# Allegro board BSTPLC.brd

Outline 406.4 x 406.4 mm; copper layers: TOP, GND_TOP, VTT, VEE, VCC, GND_BOT, BOTTOM. Coordinates in mm from the lower left corner of the outline.
Outline path: rectangle 0,0 406.4,406.4

## Design rules (mm)
net group DP_BCKP_CLK_BUFD: nets BCKP_CLK_BUFD_N BCKP_CLK_BUFD_P
net group DP_CHANGE_CLK2: nets CHANGE_CLK2_N CHANGE_CLK2_P
net group DP_CHOSEN_CLK: nets CHOSEN_CLK_N CHOSEN_CLK_P
net group DP_CHOSEN_CLK2: nets CHOSEN_CLK2_N CHOSEN_CLK2_P
net group DP_CLK_BAD: nets CLK_BAD_N CLK_BAD_P
net group DP_DEF_CLK_DIV2: nets DEF_CLK_DIV2_N DEF_CLK_DIV2_P
net group DP_DEF_CLK_DIV4: nets DEF_CLK_DIV4_N DEF_CLK_DIV4_P
net group DP_DEF_CLK_DIV8: nets DEF_CLK_DIV8_N DEF_CLK_DIV8_P
net group DP_DEF_CLK_DIVD: nets DEF_CLK_DIVD_N DEF_CLK_DIVD_P
net group DP_GT2_N: nets GT2_N UNNAMED_1_CAENCOMS_I8_GT2P
net group DP_RIB1: nets RIB1_N RIB1_P
net group DP_RIB2: nets RIB2_N RIB2_P
net group DP_RIB3: nets RIB3_N RIB3_P
net group DP_RIB4: nets RIB4_N RIB4_P
net group DP_RIB5: nets RIB5_N RIB5_P
net group DP_RIB6: nets RIB6_N RIB6_P
net group DP_RIB7: nets RIB7_N RIB7_P
net group DP_RIB8: nets RIB8_N RIB8_P
net group DP_RIB9: nets RIB9_N RIB9_P
net group DP_RIB10: nets RIB10_N RIB10_P
net group DP_SMELLIE_DELAY_BUF: nets SMELLIE_DELAY_BUF_N SMELLIE_DELAY_BUF_P
net group DP_SYNC24_2: nets SYNC24_2_N SYNC24_2_P
net group DP_SYNC_2: nets SYNC_2_N SYNC_2_P
net group DP_TELLIE_DELAY_BUF: nets TELLIE_DELAY_BUF_N TELLIE_DELAY_BUF_P
net group DP_TRIG_GATE1: nets TRIG_GATE1_N TRIG_GATE1_P
net group DP_TRIG_GATE2: nets TRIG_GATE2_N TRIG_GATE2_P
net group DP_TRIG_PULS1: nets TRIG_PULS1_N TRIG_PULS1_P
net group DP_TRIG_PULS2: nets TRIG_PULS2_N TRIG_PULS2_P
net group DP_UNNAMED_1_AD96687_I1_Q1: nets UNNAMED_1_AD96687_I1_Q1 UNNAMED_1_AD96687_I1_Q1_1
net group DP_UNNAMED_1_AD96687_I1_Q2: nets UNNAMED_1_AD96687_I1_Q2 UNNAMED_1_AD96687_I1_Q2_1
net group DP_UNNAMED_1_CHANGECLKS_I3_BCKPCLK2: nets UNNAMED_1_CHANGECLKS_I3_BCKPC_1 UNNAMED_1_CHANGECLKS_I3_BCKPCLK
net group DP_UNNAMED_1_CHANGECLKS_I3_BCKPCLK3: nets UNNAMED_1_CHANGECLKS_I3_BCKPC_2 UNNAMED_1_CHANGECLKS_I3_BCKPC_3
net group DP_UNNAMED_1_CHANGECLKS_I3_CHANGECLK: nets UNNAMED_1_CHANGECLKS_I3_CHANG_1 UNNAMED_1_CHANGECLKS_I3_CHANGEC
net group DP_UNNAMED_1_CHANGECLKS_I3_DEFAULTCLK2: nets UNNAMED_1_CHANGECLKS_I3_DEFAU_1 UNNAMED_1_CHANGECLKS_I3_DEFAULT
net group DP_UNNAMED_1_CSMD0603_I10_B: nets UNNAMED_1_CSMD0603_I10_B_1 UNNAMED_1_FRONTPORTS_I2_SMELLIE
net group DP_UNNAMED_1_CSMD0603_I54_B: nets UNNAMED_1_CSMD0603_I54_B UNNAMED_1_FRONTPORTS_I2_EXTT<0>
net group DP_UNNAMED_1_CSMD0603_I55_A: nets UNNAMED_1_CSMD0603_I55_A UNNAMED_1_FRONTPORTS_I2_EXTT<4>
net group DP_UNNAMED_1_CSMD0805_I64_B: nets UNNAMED_1_CSMD0805_I64_B UNNAMED_1_CSMD0805_I70_B
net group DP_UNNAMED_1_DEFAULTCLKSEL_I1_DEFAULTCLK: nets UNNAMED_1_DEFAULTCLKSEL_I1_BCKP UNNAMED_1_MC10E116_I1_D0
net group DP_UNNAMED_1_FRONTPORTS_I2_CLK100: nets UNNAMED_1_FRONTPORTS_I2_CLK100N UNNAMED_1_FRONTPORTS_I2_CLK100P
net group DP_UNNAMED_1_FRONTPORTS_I2_ECLTOLVDSIN: nets UNNAMED_1_FRONTPORTS_I2_ECLTOLV VBB_TRANS
net group DP_UNNAMED_1_FRONTPORTS_I2_GT: nets UNNAMED_1_FRONTPORTS_I2_GTN UNNAMED_1_FRONTPORTS_I2_GTP
net group DP_UNNAMED_1_FRONTPORTS_I2_LOSTAROUT: nets UNNAMED_1_FRONTPORTS_I2_LOSTA_1 UNNAMED_1_FRONTPORTS_I2_LOSTARO
net group DP_UNNAMED_1_FRONTPORTS_I2_MTCAMIMIC1OUT: nets UNNAMED_1_FRONTPORTS_I2_MTCAM_1 UNNAMED_1_FRONTPORTS_I2_MTCAMIM
net group DP_UNNAMED_1_FRONTPORTS_I2_MTCAMIMIC2OUT: nets UNNAMED_1_FRONTPORTS_I2_MTCAM_3 UNNAMED_1_FRONTPORTS_I2_MTCAM_4
net group DP_UNNAMED_1_FRONTPORTS_I2_MTCDLO: nets LO_STAR_RAW UNNAMED_1_MC10E116_I2_D0
net group DP_UNNAMED_1_FRONTPORTS_I2_RIBBONPULSEIN: nets UNNAMED_1_FRONTPORTS_I2_RIBBO_1 UNNAMED_1_FRONTPORTS_I2_RIBBONP
net group DP_UNNAMED_1_FRONTPORTS_I2_RIBBONPULSEOUT: nets UNNAMED_1_FRONTPORTS_I2_RIBBO_2 UNNAMED_1_FRONTPORTS_I2_RIBBO_3
net group DP_UNNAMED_1_FRONTPORTS_I2_SYNC: nets UNNAMED_1_FRONTPORTS_I2_SYNCN UNNAMED_1_FRONTPORTS_I2_SYNCP
net group DP_UNNAMED_1_FRONTPORTS_I2_SYNC24: nets UNNAMED_1_FRONTPORTS_I2_SYNC24N UNNAMED_1_FRONTPORTS_I2_SYNC24P
net group DP_UNNAMED_1_FRONTPORTS_I2_SYNC24LVDS: nets UNNAMED_1_FRONTPORTS_I2_SYNC2_1 UNNAMED_1_FRONTPORTS_I2_SYNC24L
net group DP_UNNAMED_1_FRONTPORTS_I2_SYNCLVDS: nets UNNAMED_1_FRONTPORTS_I2_SYNCL_1 UNNAMED_1_FRONTPORTS_I2_SYNCLVD
net group DP_UNNAMED_1_MC10E116_I1_Q0: nets UNNAMED_1_MC10E116_I1_Q0 UNNAMED_1_MC10E116_I1_Q0_1
net group DP_UNNAMED_1_MC10E116_I1_Q3: nets UNNAMED_1_MC10E116_I1_Q3 UNNAMED_1_MC10E116_I1_Q3_1
net group DP_UNNAMED_1_MC10E116_I3_Q0: nets UNNAMED_1_MC10E116_I3_Q0 UNNAMED_1_MC10E116_I3_Q0_1
net group DP_UNNAMED_1_MC10E116_I3_Q1: nets UNNAMED_1_MC10E116_I3_Q1 UNNAMED_1_MC10E116_I3_Q1_1
net group DP_UNNAMED_1_MC10E116_I3_Q2: nets UNNAMED_1_MC10E116_I3_Q2 UNNAMED_1_MC10E116_I3_Q2_1
net group DP_UNNAMED_1_MC10E116_I3_Q3: nets UNNAMED_1_MC10E116_I3_Q3 UNNAMED_1_MC10E116_I3_Q3_1
net group DP_UNNAMED_1_MC10E116_I4_Q0: nets UNNAMED_1_MC10E116_I4_Q0 UNNAMED_1_MC10E116_I4_Q0_1
net group DP_UNNAMED_1_MC10E116_I4_Q1: nets UNNAMED_1_MC10E116_I4_Q1 UNNAMED_1_MC10E116_I4_Q1_1
net group DP_UNNAMED_1_MC10E116_I4_Q2: nets UNNAMED_1_MC10E116_I4_Q2 UNNAMED_1_MC10E116_I4_Q2_1
net group DP_UNNAMED_1_MC10E116_I4_Q3: nets UNNAMED_1_MC10E116_I4_Q3 UNNAMED_1_MC10E116_I4_Q3_1
net group DP_UNNAMED_1_MC10E116_I22_Q0: nets UNNAMED_1_MC10E116_I22_Q0 UNNAMED_1_MC10E116_I22_Q0_1
net group DP_UNNAMED_1_MC10E116_I22_Q1: nets UNNAMED_1_MC10E116_I22_Q1 UNNAMED_1_MC10E116_I22_Q1_1
net group DP_USE_BCKP: nets USE_BCKP_N USE_BCKP_P
net group DP_USE_DEFAULT: nets USE_DEFAULT_N USE_DEFAULT_P
net group BACKPLANE_IN: nets BACKPLANE_IN<1> BACKPLANE_IN<2> BACKPLANE_IN<3> BACKPLANE_IN<4> BACKPLANE_IN<5> BACKPLANE_IN<6> BACKPLANE_IN<7> BACKPLANE_IN<8> BACKPLANE_IN<9> BACKPLANE_IN<10>
net group BACKPLANE_OUT: nets BACKPLANE_OUT<1> BACKPLANE_OUT<2> BACKPLANE_OUT<3> BACKPLANE_OUT<4> BACKPLANE_OUT<5> BACKPLANE_OUT<6> BACKPLANE_OUT<7> BACKPLANE_OUT<8> BACKPLANE_OUT<9> BACKPLANE_OUT<10>
net group CAEN_BUFF_CNTRL: nets CAEN_BUFF_CNTRL<0> CAEN_BUFF_CNTRL<1> CAEN_BUFF_CNTRL<2> CAEN_BUFF_CNTRL<3> CAEN_BUFF_CNTRL<4> CAEN_BUFF_CNTRL<5> CAEN_BUFF_CNTRL<6> CAEN_BUFF_CNTRL<7>
net group CNTRL_RAW: nets CNTRL_RAW<0> CNTRL_RAW<1> CNTRL_RAW<2> CNTRL_RAW<3> CNTRL_RAW<4> CNTRL_RAW<5> CNTRL_RAW<6> CNTRL_RAW<7>
net group COUNT_DATA_ECL: nets COUNT_DATA_ECL<1> COUNT_DATA_ECL<2> COUNT_DATA_ECL<3> COUNT_DATA_ECL<4> COUNT_DATA_ECL<5> COUNT_DATA_ECL<6> COUNT_DATA_ECL<7>
net group LE: nets UNNAMED_1_HCT238_I53_A0 UNNAMED_1_HCT238_I53_A1 UNNAMED_1_HCT238_I53_A2
net group UNNAMED_1_EXTTRIGS_I70_EXTTRIGO: nets UNNAMED_1_EXTTRIGS_I70_EXTT<10> UNNAMED_1_EXTTRIGS_I70_EXTT<11> UNNAMED_1_EXTTRIGS_I70_EXTT<12> UNNAMED_1_EXTTRIGS_I70_EXTT<13> UNNAMED_1_EXTTRIGS_I70_EXTT<14> UNNAMED_1_EXTTRIGS_I70_EXTT<15> UNNAMED_1_EXTTRIGS_I70_EXTTR<0> UNNAMED_1_EXTTRIGS_I70_EXTTR<1> UNNAMED_1_EXTTRIGS_I70_EXTTR<2> UNNAMED_1_EXTTRIGS_I70_EXTTR<3> UNNAMED_1_EXTTRIGS_I70_EXTTR<4> UNNAMED_1_EXTTRIGS_I70_EXTTR<5> UNNAMED_1_EXTTRIGS_I70_EXTTR<6> UNNAMED_1_EXTTRIGS_I70_EXTTR<7> UNNAMED_1_EXTTRIGS_I70_EXTTR<8> UNNAMED_1_EXTTRIGS_I70_EXTTR<9>
net group UNNAMED_1_FRONTPORTS_I2_CAENOUT: nets UNNAMED_1_FRONTPORTS_I2_CAEN<0> UNNAMED_1_FRONTPORTS_I2_CAEN<1> UNNAMED_1_FRONTPORTS_I2_CAEN<2> UNNAMED_1_FRONTPORTS_I2_CAEN<3> UNNAMED_1_FRONTPORTS_I2_CAEN<4> UNNAMED_1_FRONTPORTS_I2_CAEN<5> UNNAMED_1_FRONTPORTS_I2_CAEN<6> UNNAMED_1_FRONTPORTS_I2_CAEN<7>
net group UNNAMED_1_FRONTPORTS_I2_EXTTRIG: nets UNNAMED_1_FRONTPORTS_I2_EXT<10> UNNAMED_1_FRONTPORTS_I2_EXT<11> UNNAMED_1_FRONTPORTS_I2_EXT<12> UNNAMED_1_FRONTPORTS_I2_EXT<13> UNNAMED_1_FRONTPORTS_I2_EXT<14> UNNAMED_1_FRONTPORTS_I2_EXT<15> UNNAMED_1_FRONTPORTS_I2_EXTT<1> UNNAMED_1_FRONTPORTS_I2_EXTT<2> UNNAMED_1_FRONTPORTS_I2_EXTT<3> UNNAMED_1_FRONTPORTS_I2_EXTT<5> UNNAMED_1_FRONTPORTS_I2_EXTT<6> UNNAMED_1_FRONTPORTS_I2_EXTT<7> UNNAMED_1_FRONTPORTS_I2_EXTT<8> UNNAMED_1_FRONTPORTS_I2_EXTT<9>
net group UNNAMED_1_FRONTPORTS_I2_PULSE_2: nets UNNAMED_1_FRONTPORTS_I2_PUL<10> UNNAMED_1_FRONTPORTS_I2_PUL<11> UNNAMED_1_FRONTPORTS_I2_PULS<0> UNNAMED_1_FRONTPORTS_I2_PULS<1> UNNAMED_1_FRONTPORTS_I2_PULS<2> UNNAMED_1_FRONTPORTS_I2_PULS<3> UNNAMED_1_FRONTPORTS_I2_PULS<4> UNNAMED_1_FRONTPORTS_I2_PULS<5> UNNAMED_1_FRONTPORTS_I2_PULS<6> UNNAMED_1_FRONTPORTS_I2_PULS<7> UNNAMED_1_FRONTPORTS_I2_PULS<8> UNNAMED_1_FRONTPORTS_I2_PULS<9>
net group UNNAMED_1_FRONTPORTS_I2_SCALER: nets UNNAMED_1_FRONTPORTS_I2_SCAL<1> UNNAMED_1_FRONTPORTS_I2_SCAL<2> UNNAMED_1_FRONTPORTS_I2_SCAL<3> UNNAMED_1_FRONTPORTS_I2_SCAL<4> UNNAMED_1_FRONTPORTS_I2_SCAL<5> UNNAMED_1_FRONTPORTS_I2_SCAL<6>
net group UNNAMED_1_FRONTPORTS_I2_SCOPEOU: nets UNNAMED_1_FRONTPORTS_I2_SCOP<0> UNNAMED_1_FRONTPORTS_I2_SCOP<1> UNNAMED_1_FRONTPORTS_I2_SCOP<2> UNNAMED_1_FRONTPORTS_I2_SCOP<3> UNNAMED_1_FRONTPORTS_I2_SCOP<4> UNNAMED_1_FRONTPORTS_I2_SCOP<5> UNNAMED_1_FRONTPORTS_I2_SCOP<6> UNNAMED_1_FRONTPORTS_I2_SCOP<7>

## Placement (name value [footprint] x y rotation side)
C1  0.1UF  [CAP0603]  336.55 53.34 90 top
C2  0.1UF  [CAP0603]  342.9 34.29 0 top
C3  0.1UF  [CAP0603]  336.55 34.29 90 top
C4  1.0UF  [CAP0603]  73.03 129.51 90 top
C5  1.0UF  [CAP0603]  78.11 145.44 270 top
C6  1.0UF  [CAP0603]  104.8 125.1 180 bottom
C7  1.0UF  [CAP0603]  103.48 123.83 0 bottom
C8  0.1UF  [CAP805]  101.6 134.62 0 top
C9  1.0UF  [CAP0603]  92.08 143.48 90 top
C10  0.1UF  [CAP805]  99.06 154.94 180 top
C11  0.1UF  [CAP0603]  216.56 264.8 180 bottom
C12  0.1UF  [CAP0603]  194.92 239.39 0 bottom
C13  0.1UF  [CAP0603]  203.84 264.13 90 top
C14  0.1UF  [CAP0603]  196.24 248.92 180 bottom
C15  0.1UF  [CAP0603]  218.44 243.84 90 bottom
C16  1.0UF  [CAP805]  38.1 165.1 90 top
C17  1.0UF  [CAP805]  50.8 180.34 90 top
C18  1.0UF  [CAP805]  50.8 165.1 270 top
C19  1.0UF  [CAP805]  38.1 180.34 90 top
C20  1.0UF  [CAP805]  63.5 165.1 90 top
C21  1.0UF  [CAP805]  63.5 180.34 270 top
C22  0.1UF  [CAP0603]  112.4 210.79 90 top
C23  0.1UF  [CAP0603]  144.17 207.01 180 bottom
C24  0.1UF  [CAP0603]  142.85 204.47 0 bottom
C25  0.1UF  [CAP0603]  140.34 188.62 270 top
C26  0.1UF  [CAP0603]  172.72 37.44 90 bottom
C27  0.1UF  [CAP0603]  183.49 17.78 0 bottom
C28  0.1UF  [CAP0603]  199.42 48.26 180 top
C29  0.1UF  [CAP0603]  196.85 28.55 90 top
C30  0.1UF  [CAP0603]  184.81 20.95 180 bottom
C31  10NF  [CAP0603]  142.24 124.43 90 top
C32  0.1UF  [CAP0603]  169.52 121.92 0 top
C33  0.1UF  [CAP0603]  169.52 120.65 0 bottom
C34  0.1UF  [CAP0603]  185.42 139.04 90 top
C35  0.1UF  [CAP0603]  168.88 104.14 0 bottom
C36  0.1UF  [CAP0603]  170.21 111.76 180 bottom
C37  0.1UF  [CAP0603]  186.03 102.23 0 top
C38  0.1UF  [CAP0603]  147.32 263.55 270 bottom
C39  0.1UF  [CAP0603]  154.94 262.23 90 bottom
C40  0.1UF  [CAP0603]  139.7 243.81 90 top
C41  0.1UF  [CAP0603]  273.66 32.39 0 top
C42  0.1UF  [CAP0603]  264.16 15.24 90 top
C43  0.1UF  [CAP0603]  276.22 41.3 270 bottom
C44  0.1UF  [CAP0603]  264.16 59.69 180 top
C45  0.1UF  [CAP0603]  296.54 40.61 90 bottom
C46  0.1UF  [CAP0603]  294 41.94 270 bottom
C47  0.1UF  [CAP0603]  281.3 209.52 90 top
C48  0.1UF  [CAP0603]  273.05 198.15 270 top
C49  0.1UF  [CAP805]  293.37 213.36 180 top
C50  1.0UF  [CAP0603]  303.53 203.86 270 top
C51  0.1UF  [CAP805]  293.37 195.58 0 top
C52  0.1UF  [CAP0603]  259.08 131.42 90 bottom
C53  0.1UF  [CAP0603]  276.86 131.42 90 bottom
C54  0.1UF  [CAP0603]  289.56 132.74 270 bottom
C55  0.1UF  [CAP0603]  288.92 115.6 270 bottom
C56  0.1UF  [CAP0603]  247.02 92.74 270 bottom
C57  0.1UF  [CAP0603]  267.97 111.79 270 bottom
C58  0.1UF  [CAP805]  266.06 82.55 0 top
C59  0.1UF  [CAP805]  266.7 86.36 90 bottom
C60  0.1UF  [CAP0603]  271.78 92.68 90 bottom
C61  0.1UF  [CAP805]  252.73 81.28 270 top
C62  0.1UF  [CAP0603]  269.24 94.01 270 bottom
C63  0.1UF  [CAP0603]  248.92 111.15 270 bottom
C64  0.1UF  [CAP805]  287.02 85.09 90 top
C65  0.1UF  [CAP805]  293.37 100.97 270 top
C66  0.1UF  [CAP0603]  295.91 93.32 90 top
C67  10UF  [CAP805]  84.45 48.9 90 top
C68  10UF  [CAP805]  78.74 50.8 90 top
C69  1UF  [CAP805]  84.45 53.34 90 top
C70  1UF  [CAP805]  78.74 55.88 90 top
C71  0.33UF  [CAP805]  34.92 46.36 90 top
C72  0.33UF  [CAP805]  55.25 45.09 90 top
C73  0.1UF  [CAP805]  84.45 58.42 90 top
C74  0.1UF  [CAP805]  78.74 60.96 90 top
C75  1UF  [CAP805]  85.73 72.39 0 top
C76  0.1UF  [CAP805]  54.61 57.15 90 top
C77  10UF  [CAP805]  67.95 76.84 90 top
C78  0.1UF  [CAP805]  34.92 52.7 90 top
C79  1UF  [CAP805]  85.73 72.39 180 bottom
C80  10UF  [CAP805]  67.31 81.28 90 top
C81  1UF  [CAP805]  67.31 84.45 90 top
C82  0.1UF  [CAP805]  67.31 87.63 90 top
C83  10NF  [CAP805]  67.31 91.44 270 top
C84  0.1UF  [CAP0603]  213.36 198.12 0 top
C85  0.1UF  [CAP0603]  198.75 195.58 0 top
C86  0.1UF  [CAP0603]  306.12 255.27 180 bottom
C87  0.1UF  [CAP0603]  281.3 252.73 90 bottom
C88  0.1UF  [CAP805]  93.98 260.99 180 top
C89  0.1UF  [CAP0603]  80.62 255.27 0 bottom
C90  0.1UF  [CAP805]  48.26 262.25 0 top
C91  0.1UF  [CAP805]  45.08 239.39 90 bottom
C92  0.1UF  [CAP805]  60.33 231.14 90 top
C93  0.1UF  [CAP805]  52.07 262.25 180 top
C94  0.1UF  [CAP805]  45.08 235.58 270 bottom
C137  0.1UF  [CAP805]  180.2 356.63 0 top
C138  0.1UF  [CAP805]  183.85 356.63 0 top
C139  0.1UF  [CAP805]  103.51 365.76 270 top
C140  0.1UF  [CAP805]  114.94 349.25 270 top
C141  1UF  [CAP805]  318.13 319.41 180 bottom
C142  1UF  [CAP805]  272.41 299.72 0 top
C143  1UF  [CAP805]  265.43 292.74 90 top
C144  1UF  [CAP805]  163.83 321.94 0 top
C145  1UF  [CAP805]  263.52 316.23 90 top
C146  1UF  [CAP805]  252.09 318.77 180 bottom
C147  1UF  [CAP805]  99.06 300.99 0 top
C148  1UF  [CAP805]  90.17 317.5 90 top
C149  1UF  [CAP805]  198.75 325.75 0 top
C150  1UF  [CAP805]  194.31 295.28 90 top
C151  1UF  [CAP805]  284.48 318.77 180 bottom
C152  1UF  [CAP805]  201.3 302.26 0 top
C153  1UF  [CAP805]  192.41 318.77 90 top
C154  1UF  [CAP805]  234.31 325.75 0 top
C155  1UF  [CAP805]  229.87 295.28 90 top
C156  1UF  [CAP805]  146.05 317.5 180 bottom
C157  1UF  [CAP805]  236.85 302.26 0 top
C158  1UF  [CAP805]  227.97 318.77 90 top
C159  1UF  [CAP805]  269.88 323.22 0 top
C160  1UF  [CAP805]  92.08 294 90 top
C161  1UF  [CAP805]  180.97 321.31 180 bottom
C162  1UF  [CAP805]  96.52 324.49 0 top
C163  1UF  [CAP805]  329.56 316.87 90 top
C164  1UF  [CAP805]  338.45 300.36 0 top
C165  1UF  [CAP805]  331.47 293.37 90 top
C166  1UF  [CAP805]  216.53 321.31 180 bottom
C167  1UF  [CAP805]  335.91 323.85 0 top
C168  1UF  [CAP805]  295.91 316.23 90 top
C169  1UF  [CAP805]  304.8 299.72 0 top
C170  1UF  [CAP805]  297.81 292.74 90 top
C171  1UF  [CAP805]  78.74 320.04 180 bottom
C172  1UF  [CAP805]  302.26 323.22 0 top
C173  1UF  [CAP805]  157.48 314.96 90 top
C174  1UF  [CAP805]  166.37 298.45 0 top
C175  1UF  [CAP805]  159.38 291.47 90 top
C176  1UF  [CAP805]  351.79 320.04 180 bottom
C177  1UF  [CAP805]  369.57 324.49 0 top
C178  1UF  [CAP805]  363.22 317.5 90 top
C179  1UF  [CAP805]  372.11 300.99 0 top
C180  1UF  [CAP805]  365.12 294 90 top
C181  0.1UF  [CAP805]  128.27 365.12 0 top
D1  -  [LED_SSFLXH1031D]  125.73 139.03 180 top
D2  -  [LED_SSFLXH1031D]  125.73 145.38 180 top
D3  -  [LED_SSFLXH1031D]  191.13 257.14 180 top
D4  -  [LED_SSFLXH1031D]  149.86 234.28 180 top
D5  -  [LED_SSFLXH1031D]  283.21 182.21 180 top
D6  -  [LED_SSFLXH1031D]  276.22 184.12 180 top
D7  -  [LED_SSFLXH1031D]  305.44 103.5 0 top
D8  -  [LED_SSFLXH1031D]  311.78 90.81 270 top
D9  -  [LED_SSFLXH1031D]  46.36 100.97 0 top
D10  -  [LED_SSFLXH1031D]  38.73 102.27 0 top
D11  -  [LED_SSFLXH1031D]  46.36 94.65 0 top
D12  -  [LED_SSFLXH1031D]  52.07 97.16 90 top
D13  -  [LED_SSFLXH1031D]  37.47 96.55 0 top
D14  -  [LED_SSFLXH1031D]  59.02 97.79 90 top
L1  -  [INDUCT400]  74.3 29.21 0 top
L2  -  [INDUCT400]  89.53 29.21 0 top
L3  -  [INDUCT400]  64.77 29.21 0 top
L4  -  [INDUCT400]  36.83 27.94 0 top
Q1  -  [TO220ABV]  60.97 48.87 0 top
Q2  -  [TO220ABH]  41.26 48.82 270 top
Q3  -  [TO220ABV]  93.36 75.54 0 top
Q4  -  [SOT223]  76.2 82.55 90 top
R1  10K  [RES805]  104.14 154.94 180 top
R2  10K  [RES805]  106.68 134.62 0 top
R3  100  [RES805]  110.49 151.76 180 top
R4  100  [RES805]  120.65 153.03 0 top
R5  100  [RES805]  191.13 264.16 180 top
R6  50  [RES805]  206.38 260.35 0 top
R7  50  [RES805]  215.9 259.08 90 bottom
R8  50  [RES805]  224.79 250.82 90 bottom
R9  50  [RES805]  206.38 250.82 0 top
R10  50  [RES805]  225.43 246.38 0 bottom
R11  50  [RES805]  206.38 245.11 180 top
R13  50  [RES805]  126.37 195.58 90 top
R14  50  [RES805]  148.59 197.48 90 top
R15  50  [RES805]  153.67 202.56 0 top
R16  50  [RES805]  135.25 205.74 180 top
R17  50  [RES805]  139.06 195.58 270 top
R18  1000  [RES805]  119.38 195.58 270 top
R19  1000  [RES805]  126.37 186.05 90 top
R20  50  [RES805]  179.71 122.56 180 top
R21  50  [RES805]  179.71 129.54 180 top
R22  50  [RES805]  179.71 139.7 0 top
R23  50  [RES805]  184.78 122.56 180 top
R24  50  [RES805]  198.12 107.31 270 top
R25  50  [RES805]  198.12 118.11 270 top
R26  50  [RES805]  198.12 112.39 270 top
R27  50  [RES805]  191.77 119.38 0 top
R28  100  [RES805]  154.94 235.58 0 top
R29  50  [RES805]  161.29 245.74 180 top
R30  50  [RES805]  151.13 243.2 270 bottom
R31  50  [RES805]  151.13 247.01 270 bottom
R32  50  [RES805]  266.7 34.93 90 top
R33  50  [RES805]  276.86 52.07 0 top
R34  50  [RES805]  267.33 49.53 0 top
R35  50  [RES805]  264.16 59.69 90 top
R36  50  [RES805]  293.37 52.07 0 top
R37  50  [RES805]  289.56 52.07 0 top
R38  10K  [RES805]  297.18 195.58 0 top
R39  10K  [RES805]  289.56 213.36 180 top
R40  100  [RES805]  290.19 188.59 0 top
R41  100  [RES805]  294.64 182.88 180 top
R42  50  [RES805]  260.98 121.92 270 top
R43  50  [RES805]  254.64 121.92 90 bottom
R44  50  [RES805]  248.28 121.92 270 bottom
R45  50  [RES805]  241.3 132.08 0 top
R46  50  [RES805]  248.28 142.88 270 bottom
R47  50  [RES805]  254.64 142.88 90 bottom
R48  50  [RES805]  260.98 142.88 270 top
R49  50  [RES805]  282.57 115.57 0 bottom
R50  50  [RES805]  266.7 121.92 90 top
R51  50  [RES805]  274.95 114.94 90 bottom
R52  50  [RES805]  267.33 123.19 180 bottom
R53  50  [RES805]  281.3 121.28 270 top
R54  50  [RES805]  302.89 127.64 270 top
R55  50  [RES805]  296.54 142.24 0 top
R56  50  [RES805]  291.46 104.78 270 top
R57  50  [RES805]  302.89 119.38 270 top
R58  50  [RES805]  302.89 112.39 270 top
R59  50  [RES805]  302.89 116.2 270 top
R60  50  [RES805]  274.95 121.92 90 bottom
R61  50  [RES805]  260.98 115.57 180 top
R62  50  [RES805]  238.12 87 180 top
R63  50  [RES805]  260.35 95.25 180 bottom
R64  50  [RES805]  244.47 81.28 90 top
R65  50  [RES805]  252.73 77.47 90 top
R66  1000  [RES805]  260.35 87.63 180 top
R67  50  [RES805]  272.41 83.82 270 top
R68  1000  [RES805]  260.35 82.55 0 top
R69  50  [RES805]  260.35 87.63 0 bottom
R70  50  [RES805]  262.89 100.97 270 bottom
R71  50  [RES805]  268.6 100.97 270 top
R72  10K  [RES805]  293.37 85.09 270 top
R73  50  [RES805]  260.98 109.86 0 bottom
R74  50  [RES805]  241.94 102.87 0 bottom
R75  10K  [RES805]  285.11 100.97 270 top
R76  100  [RES805]  305.44 97.16 180 top
R77  100  [RES805]  305.44 90.81 90 top
R78  1000  [RES805]  40 84.45 180 top
R79  1000  [RES805]  36.83 87 0 top
R80  71.5  [RES805]  85.73 78.74 180 top
R81  120  [RES805]  85.73 83.82 180 top
R82  1000  [RES805]  40.64 88.27 270 top
R83  1000  [RES805]  50.8 87.63 0 top
R84  1000  [RES805]  44.45 87.63 180 top
R85  1000  [RES805]  47.62 87.63 180 top
R86  1000  [RES805]  207.01 201.29 270 top
R87  1000  [RES805]  207.01 189.23 90 top
R88  50  [RES805]  314.96 254 0 top
R89  50  [RES805]  314.96 248.92 180 top
R90  50  [RES805]  299.72 259.08 270 bottom
R91  50  [RES805]  304.8 259.08 90 bottom
R92  50  [RES805]  304.8 248.92 90 bottom
R93  50  [RES805]  297.18 254 180 bottom
R94  50  [RES805]  284.48 259.08 270 bottom
R95  50  [RES805]  289.56 259.08 90 bottom
R96  50  [RES805]  287.02 248.92 90 bottom
R97  50  [RES805]  287.02 251.46 90 bottom
R98  50  [RES805]  289.56 243.84 90 bottom
R99  50  [RES805]  284.48 243.84 270 bottom
R100  50  [RES805]  81.28 269.88 90 bottom
R101  50  [RES805]  71.12 259.72 0 bottom
R102  50  [RES805]  88.9 269.88 90 bottom
R103  50  [RES805]  60.96 258.44 270 bottom
R104  50  [RES805]  64.77 267.34 270 top
R105  50  [RES805]  60.96 249.55 90 top
R106  50  [RES805]  60.96 262.25 270 bottom
R107  50  [RES805]  85.09 248.92 270 top
R108  1000  [RES805]  100.33 260.99 180 top
R109  1000  [RES805]  72.39 244.47 90 top
R183  100  [RES805]  350.52 344.17 0 top
R184  100  [RES805]  316.86 344.17 0 top
R185  100  [RES805]  251.46 343.54 0 top
R186  100  [RES805]  283.84 343.54 0 top
R187  50  [RES805]  111.76 205.74 180 bottom
R188  50  [RES805]  111.76 200.66 180 bottom
R189  50  [RES805]  111.76 196.21 270 bottom
R190  50  [RES805]  111.76 191.77 270 bottom
R191  50  [RES805]  124.46 208.28 90 bottom
R192  50  [RES805]  124.46 203.83 90 bottom
R193  2K  [RES805]  326.39 314.32 0 top
R194  -  [RES805]  321.94 314.32 0 top
R195  -  [RES805]  318.13 314.32 180 bottom
R196  -  [RES805]  321.94 319.41 180 bottom
R197  -  [RES805]  325.12 320.04 180 top
R198  -  [RES805]  314.96 309.25 0 bottom
R199  111  [RES805]  321.94 314.32 0 bottom
R200  10  [RES805]  314.32 301.62 180 top
R201  -  [RES805]  330.83 321.94 90 bottom
R202  499  [RES805]  330.2 309.25 0 top
R203  -  [RES805]  326.39 309.25 0 top
R204  -  [RES805]  325.12 325.12 180 top
R205  0  [RES805]  330.2 309.25 180 bottom
R206  0  [RES805]  327.66 295.28 180 top
R207  0  [RES805]  329.56 325.75 90 top
R208  -  [RES805]  327.66 300.36 180 top
R209  0  [RES805]  332.1 302.26 90 top
R210  2K  [RES805]  260.35 313.69 0 top
R211  -  [RES805]  255.91 313.69 0 top
R212  -  [RES805]  252.09 313.69 180 bottom
R213  -  [RES805]  255.91 318.77 180 bottom
R214  -  [RES805]  259.08 319.41 180 top
R215  -  [RES805]  248.92 308.61 0 bottom
R216  111  [RES805]  255.91 313.69 0 bottom
R217  10  [RES805]  248.28 300.99 180 top
R218  -  [RES805]  264.79 321.31 90 bottom
R219  499  [RES805]  264.16 308.61 0 top
R220  -  [RES805]  260.35 308.61 0 top
R221  -  [RES805]  259.08 324.49 180 top
R222  0  [RES805]  264.16 308.61 180 bottom
R223  0  [RES805]  261.62 294.64 180 top
R224  0  [RES805]  263.52 325.12 90 top
R225  -  [RES805]  261.62 299.72 180 top
R226  0  [RES805]  266.06 301.62 90 top
R227  2K  [RES805]  292.73 313.69 0 top
R228  -  [RES805]  288.29 313.69 0 top
R229  -  [RES805]  284.48 313.69 180 bottom
R230  -  [RES805]  288.29 318.77 180 bottom
R231  -  [RES805]  291.46 319.41 180 top
R232  -  [RES805]  281.3 308.61 0 bottom
R233  111  [RES805]  288.29 313.69 0 bottom
R234  10  [RES805]  280.67 300.99 180 top
R235  -  [RES805]  297.18 321.31 90 bottom
R236  499  [RES805]  296.54 308.61 0 top
R237  -  [RES805]  292.73 308.61 0 top
R238  -  [RES805]  291.46 324.49 180 top
R239  0  [RES805]  296.54 308.61 180 bottom
R240  0  [RES805]  294 294.64 180 top
R241  0  [RES805]  295.91 325.12 90 top
R242  -  [RES805]  294 299.72 180 top
R243  0  [RES805]  298.45 301.62 90 top
R244  2K  [RES805]  154.31 312.42 0 top
R245  -  [RES805]  149.86 312.42 0 top
R246  -  [RES805]  146.05 312.42 180 bottom
R247  -  [RES805]  149.86 317.5 180 bottom
R248  -  [RES805]  153.03 318.13 180 top
R249  -  [RES805]  142.88 307.34 0 bottom
R250  111  [RES805]  149.86 312.42 0 bottom
R251  10  [RES805]  142.24 299.72 180 top
R252  -  [RES805]  158.75 320.04 90 bottom
R253  499  [RES805]  158.12 307.34 0 top
R254  -  [RES805]  154.31 307.34 0 top
R255  -  [RES805]  153.03 323.22 180 top
R256  0  [RES805]  158.12 307.34 180 bottom
R257  0  [RES805]  155.58 293.37 180 top
R258  0  [RES805]  157.48 323.85 90 top
R259  -  [RES805]  155.58 298.45 180 top
R260  0  [RES805]  160.02 300.36 90 top
R261  2K  [RES805]  189.23 316.23 0 top
R262  -  [RES805]  184.78 316.23 0 top
R263  -  [RES805]  180.97 316.23 180 bottom
R264  -  [RES805]  184.78 321.31 180 bottom
R265  -  [RES805]  187.96 321.94 180 top
R266  -  [RES805]  177.8 311.15 0 bottom
R267  111  [RES805]  184.78 316.23 0 bottom
R268  10  [RES805]  177.16 303.53 180 top
R269  -  [RES805]  193.68 323.85 90 bottom
R270  499  [RES805]  193.04 311.15 0 top
R271  -  [RES805]  189.23 311.15 0 top
R272  -  [RES805]  187.96 327.03 180 top
R273  0  [RES805]  193.04 311.15 180 bottom
R274  0  [RES805]  190.5 297.18 180 top
R275  0  [RES805]  192.41 327.66 90 top
R276  -  [RES805]  190.5 302.26 180 top
R277  0  [RES805]  194.94 304.17 90 top
R278  2K  [RES805]  224.79 316.23 0 top
R279  -  [RES805]  220.34 316.23 0 top
R280  -  [RES805]  216.53 316.23 180 bottom
R281  -  [RES805]  220.34 321.31 180 bottom
R282  -  [RES805]  223.52 321.94 180 top
R283  -  [RES805]  213.36 311.15 0 bottom
R284  111  [RES805]  220.34 316.23 0 bottom
R285  10  [RES805]  212.72 303.53 180 top
R286  -  [RES805]  229.24 323.85 90 bottom
R287  499  [RES805]  228.6 311.15 0 top
R288  -  [RES805]  224.79 311.15 0 top
R289  -  [RES805]  223.52 327.03 180 top
R290  0  [RES805]  228.6 311.15 180 bottom
R291  0  [RES805]  226.06 297.18 180 top
R292  0  [RES805]  227.97 327.66 90 top
R293  -  [RES805]  226.06 302.26 180 top
R294  0  [RES805]  230.5 304.17 90 top
R295  2K  [RES805]  87 314.96 0 top
R296  -  [RES805]  82.55 314.96 0 top
R297  -  [RES805]  78.74 314.96 180 bottom
R298  -  [RES805]  82.55 320.04 180 bottom
R299  -  [RES805]  85.73 320.68 180 top
R300  -  [RES805]  75.56 309.88 0 bottom
R301  111  [RES805]  82.55 314.96 0 bottom
R302  10  [RES805]  74.93 302.26 180 top
R303  -  [RES805]  91.44 322.58 90 bottom
R304  499  [RES805]  90.81 309.88 0 top
R305  -  [RES805]  87 309.88 0 top
R306  -  [RES805]  85.73 325.75 180 top
R307  0  [RES805]  90.81 309.88 180 bottom
R308  0  [RES805]  88.27 295.91 180 top
R309  0  [RES805]  90.17 326.39 90 top
R310  -  [RES805]  88.27 300.99 180 top
R311  0  [RES805]  92.71 302.9 90 top
R312  2K  [RES805]  360.04 314.96 0 top
R313  -  [RES805]  355.6 314.96 0 top
R314  -  [RES805]  351.79 314.96 180 bottom
R315  -  [RES805]  355.6 320.04 180 bottom
R316  -  [RES805]  358.77 320.68 180 top
R317  -  [RES805]  348.61 309.88 0 bottom
R318  111  [RES805]  355.6 314.96 0 bottom
R319  10  [RES805]  347.98 302.26 180 top
R320  -  [RES805]  364.49 322.58 90 bottom
R321  499  [RES805]  363.85 309.88 0 top
R322  -  [RES805]  360.04 309.88 0 top
R323  -  [RES805]  358.77 325.75 180 top
R324  0  [RES805]  363.85 309.88 180 bottom
R325  0  [RES805]  361.31 295.91 180 top
R326  0  [RES805]  363.22 326.39 90 top
R327  -  [RES805]  361.31 300.99 180 top
R328  0  [RES805]  365.76 302.9 90 top
R329  50  [RES805]  147.32 214.63 270 top
R330  50  [RES805]  153.67 210.18 0 top
R331  50  [RES805]  158.75 31.75 180 top
R332  50  [RES805]  165.74 25.4 180 top
R333  50  [RES805]  181.61 35.56 270 top
R334  50  [RES805]  175.9 25.4 180 top
R335  50  [RES805]  190.5 37.47 270 top
R336  50  [RES805]  193.04 18.41 180 top
R337  50  [RES805]  193.04 25.4 0 top
R338  50  [RES805]  181.61 28.58 90 top
R339  50  [RES805]  199.39 39.37 180 top
R340  50  [RES805]  186.69 50.8 0 top
R341  50  [RES805]  190.5 41.27 90 top
R342  50  [RES805]  197.49 25.4 0 top
R343  50  [RES805]  191.13 50.8 0 top
R344  50  [RES805]  194.31 39.37 180 top
R345  50  [RES805]  213.36 48.26 180 bottom
R346  50  [RES805]  215.9 31.12 180 top
R347  50  [RES805]  208.28 48.26 180 bottom
R348  50  [RES805]  210.82 31.12 180 top
R350  50  [RES805]  245.75 132.08 90 top
R351  5.1K  [RES805]  241.94 114.94 0 top
R352  5.1K  [RES805]  241.94 107.95 0 top
R353  5.1K  [RES805]  241.94 120.02 270 top
R354  10K  [RES805]  140.97 362.59 90 top
R355  10K  [RES805]  146.69 373.38 90 top
TP1  -  [FEC32DTP]  351.15 40.64 0 top
TP2  -  [FEC32DTP]  351.15 46.99 0 top
TP3  -  [FEC32DTP]  323.85 59.69 0 top
TP4  -  [FEC32DTP]  323.85 53.34 0 top
TP5  -  [FEC32DTP]  330.2 59.69 0 top
TP6  -  [FEC32DTP]  336.55 59.69 0 top
TP7  -  [FEC32DTP]  344.8 40.64 0 top
TP8  -  [FEC32DTP]  336.55 53.34 0 top
TP9  -  [FEC32DTP]  330.2 27.94 0 top
TP10  -  [FEC32DTP]  323.85 27.94 0 top
TP12  -  [FEC32DTP]  186.7 118.12 0 top
TP13  -  [FEC32DTP]  78.75 66.05 0 top
TP14  -  [FEC32DTP]  84.47 64.15 0 top
TP15  -  [FEC32DTP]  52.72 69.23 0 top
TP16  -  [FEC32DTP]  31.76 60.34 0 top
TP17  -  [FEC32DTP]  85.74 89.55 0 top
TP127  -  [FEC32DTP]  302.27 132.09 0 top
TP129  -  [FEC32DTP]  302.27 106.69 0 top
TP130  -  [FEC32DTP]  301.64 123.2 0 top
TP135  -  [FEC32DTP]  256.55 118.12 0 top
TP136  -  [FEC32DTP]  274.33 100.98 0 top
TP143  -  [FEC32DTP]  372.11 269.24 0 top
TP144  -  [FEC32DTP]  365.76 205.74 0 top
TP145  -  [FEC32DTP]  372.11 256.54 0 top
TP146  -  [FEC32DTP]  359.41 205.74 0 top
TP147  -  [FEC32DTP]  346.71 237.49 0 top
TP148  -  [FEC32DTP]  353.06 205.74 0 top
TP149  -  [FEC32DTP]  359.41 250.19 0 top
TP150  -  [FEC32DTP]  346.71 205.74 0 top
TP151  -  [FEC32DTP]  372.11 262.89 0 top
TP152  -  [FEC32DTP]  378.46 199.39 0 top
TP153  -  [FEC32DTP]  346.71 243.84 0 top
TP154  -  [FEC32DTP]  372.11 199.39 0 top
TP155  -  [FEC32DTP]  359.41 256.54 0 top
TP156  -  [FEC32DTP]  365.76 199.39 0 top
TP157  -  [FEC32DTP]  353.06 256.54 0 top
TP158  -  [FEC32DTP]  359.41 199.39 0 top
TP159  -  [FEC32DTP]  365.76 262.89 0 top
TP160  -  [FEC32DTP]  353.06 199.39 0 top
TP161  -  [FEC32DTP]  365.76 250.19 0 top
TP162  -  [FEC32DTP]  346.71 199.39 0 top
TP163  -  [FEC32DTP]  378.46 262.89 0 top
TP164  -  [FEC32DTP]  378.46 193.04 0 top
TP165  -  [FEC32DTP]  353.06 243.84 0 top
TP166  -  [FEC32DTP]  372.11 193.04 0 top
TP167  -  [FEC32DTP]  365.76 256.54 0 top
TP168  -  [FEC32DTP]  365.76 193.04 0 top
TP169  -  [FEC32DTP]  378.46 269.24 0 top
TP170  -  [FEC32DTP]  359.41 193.04 0 top
TP171  -  [FEC32DTP]  353.06 250.19 0 top
TP172  -  [FEC32DTP]  353.06 193.04 0 top
TP173  -  [FEC32DTP]  346.71 250.19 0 top
TP174  -  [FEC32DTP]  346.71 193.04 0 top
TP175  -  [FEC32DTP]  378.46 256.54 0 top
TP176  -  [FEC32DTP]  378.46 186.69 0 top
TP177  -  [FEC32DTP]  365.76 269.24 0 top
TP178  -  [FEC32DTP]  372.11 186.69 0 top
TP179  -  [FEC32DTP]  359.41 243.84 0 top
TP180  -  [FEC32DTP]  365.76 186.69 0 top
TP181  -  [FEC32DTP]  346.71 269.24 0 top
TP182  -  [FEC32DTP]  359.41 186.69 0 top
TP183  -  [FEC32DTP]  353.06 237.49 0 top
TP184  -  [FEC32DTP]  353.06 186.69 0 top
TP185  -  [FEC32DTP]  353.06 269.24 0 top
TP186  -  [FEC32DTP]  346.71 186.69 0 top
TP187  -  [FEC32DTP]  346.71 231.14 0 top
TP188  -  [FEC32DTP]  378.46 180.34 0 top
TP189  -  [FEC32DTP]  346.71 262.89 0 top
TP190  -  [FEC32DTP]  372.11 180.34 0 top
TP191  -  [FEC32DTP]  359.41 262.89 0 top
TP192  -  [FEC32DTP]  365.76 180.34 0 top
TP193  -  [FEC32DTP]  346.71 256.54 0 top
TP194  -  [FEC32DTP]  359.41 180.34 0 top
TP195  -  [FEC32DTP]  353.06 262.89 0 top
TP196  -  [FEC32DTP]  353.06 180.34 0 top
TP197  -  [FEC32DTP]  359.41 269.24 0 top
TP198  -  [FEC32DTP]  346.71 180.34 0 top
U1  ***  [SOIC16]  83.82 144.78 270 top
U2  ***  [SOIC14]  344.8 53.34 180 top
U3  ***  [SSOP16]  330.2 53.34 0 top
U4  ***  [SOIC20]  336.55 40.64 270 top
U6  -  [CONN10]  55.88 160.02 180 top
U7  ***  [SOIC16]  83.82 129.54 270 top
U8  ***  [PLCC20]  104.14 124.46 270 top
U9  ***  [SOIC16]  102.23 144.78 270 top
U10  ***  [PLCC20]  195.58 243.84 270 top
U11  ***  [PLCC28]  215.9 261.62 90 top
U12  ***  [PLCC20]  215.9 243.84 270 top
U13  ***  [SOIC14]  50.8 172.72 0 top
U14  ***  [SOIC14]  38.1 172.72 0 top
U15  ***  [SOIC8]  63.5 172.72 0 top
U16  -  [CONN10]  43.18 185.42 0 top
U17  ***  [PLCC28]  124.46 205.74 90 top
U18  ***  [PLCC20]  143.51 205.74 90 top
U19  -  [SOT23]  124.47 191.77 270 top
U20  ***  [SOIC8]  143.51 187.96 0 top
U21  ***  [PLCC28]  170.18 38.1 180 top
U22  ***  [SOIC8]  196.85 33.66 0 top
U23  ***  [SOIC8]  196.85 45.09 0 top
U24  ***  [PLCC20]  184.15 19.69 270 top
U25  -  [SS22SDP2]  212.09 40.01 180 top
U26  -  [SMD_FOX]  151.77 128.27 90 top
U27  ***  [SOIC20W]  170.19 129.54 0 top
U28  ***  [SOIC16]  186.69 131.44 180 top
U29  ***  [PLCC20]  169.55 107.95 270 top
U30  ***  [PLCC20]  186.69 108.59 180 top
U31  ***  [PLCC20]  151.13 262.89 180 top
U32  ***  [PLCC20]  151.13 245.11 180 top
U33  ***  [PLCC20]  277.49 22.23 270 top
U34  ***  [PLCC20]  278.13 40.64 270 top
U35  ***  [PLCC20]  295.27 41.27 0 top
U36  ***  [SOIC16]  277.49 210.82 90 top
U37  ***  [SOIC16]  277.49 197.48 270 top
U38  ***  [SOIC16]  294 203.2 90 top
U39  ***  [PLCC20]  256.54 132.08 270 top
U40  ***  [PLCC20]  274.32 132.08 270 top
U41  ***  [PLCC20]  292.1 132.08 90 top
U42  ***  [PLCC20]  291.46 114.94 90 top
U43  ***  [PLCC28]  249.55 92.08 180 top
U44  ***  [PLCC28]  271.14 111.12 270 top
U45  ***  [PLCC20]  270.51 93.34 0 top
U46  ***  [PLCC20]  251.46 110.49 180 top
U47  ***  [SOIC16]  290.83 93.98 270 top
U48  -  [OSTOQ047150]  57.78 15.24 90 top
U49  -  [OSTOQ047150]  81.92 15.24 90 top
U50  ***  [SOIC8]  207.01 194.94 0 top
U51  ***  [PLCC20]  287.02 251.46 270 top
U52  ***  [PLCC20]  304.8 251.46 180 top
U53  -  [CONN10]  289.56 264.16 0 top
U54  -  [CONN10]  299.72 238.76 180 top
U55  ***  [PLCC28]  81.28 259.72 0 top
U56  ***  [PLCC20]  60.96 259.72 180 top
U57  ***  [PLCC20]  45.08 237.49 90 top
U58  ***  [SOIC14]  60.96 238.12 0 top
U59  -  [SOT23]  98.42 266.08 0 top
U60  -  [TO92]  81.28 245.11 270 top
U97  ***  [SOIC14]  105.41 342.27 0 top
U98  ***  [SOIC14]  82.55 375.92 0 top
U99  ***  [SOIC20]  104.72 378.41 270 top
U100  ***  [SOIC20]  116.2 337.29 90 top
U101  ***  [SOIC14]  117.48 374.02 270 top
U102  ***  [DIP14_3]  355.6 345.44 0 top
U103  ***  [DIP14_3]  288.29 344.17 0 top
U104  ***  [DIP14_3]  255.91 344.17 0 top
U105  ***  [DIP14_3]  321.94 344.81 0 top
U106  ***  [SOIC8]  330.83 320.68 0 top
U107  -  [COTO2300_V1]  320.67 300.99 0 top
U108  ***  [SOIC8]  333.38 297.18 0 top
U109  -  [DO35]  342.26 306.07 0 top
U110  -  [DO35]  336.55 315.6 180 top
U111  ***  [SOIC8]  264.79 320.04 0 top
U112  -  [COTO2300_V1]  254.64 300.36 0 top
U113  ***  [SOIC8]  267.33 296.55 0 top
U114  -  [DO35]  276.22 305.44 0 top
U115  -  [DO35]  270.51 314.96 180 top
U116  ***  [SOIC8]  297.18 320.04 0 top
U117  -  [COTO2300_V1]  287.02 300.36 0 top
U118  ***  [SOIC8]  299.72 296.55 0 top
U119  -  [DO35]  308.61 305.44 0 top
U120  -  [DO35]  302.89 314.96 180 top
U121  ***  [SOIC8]  158.75 318.77 0 top
U122  -  [COTO2300_V1]  148.59 299.09 0 top
U123  ***  [SOIC8]  161.29 295.28 0 top
U124  -  [DO35]  170.18 304.17 0 top
U125  -  [DO35]  164.47 313.69 180 top
U126  ***  [SOIC8]  193.68 322.58 0 top
U127  -  [COTO2300_V1]  183.52 302.9 0 top
U128  ***  [SOIC8]  196.22 299.09 0 top
U129  -  [DO35]  205.1 307.98 0 top
U130  -  [DO35]  199.39 317.5 180 top
U131  ***  [SOIC8]  229.24 322.58 0 top
U132  -  [COTO2300_V1]  219.08 302.9 0 top
U133  ***  [SOIC8]  231.78 299.09 0 top
U134  -  [DO35]  240.66 307.98 0 top
U135  -  [DO35]  234.95 317.5 180 top
U136  ***  [SOIC8]  91.44 321.31 0 top
U137  -  [COTO2300_V1]  81.28 301.62 0 top
U138  ***  [SOIC8]  93.98 297.81 0 top
U139  -  [DO35]  102.87 306.71 0 top
U140  -  [DO35]  97.16 316.23 180 top
U141  ***  [SOIC8]  364.49 321.31 0 top
U142  -  [COTO2300_V1]  354.33 301.62 0 top
U143  ***  [SOIC8]  367.03 297.81 0 top
U144  -  [DO35]  375.92 306.71 0 top
U145  -  [DO35]  370.2 316.23 180 top
U146  ***  [SOIC8]  133.99 367.03 0 top
U147  ***  [SOIC8]  147.32 367.03 0 top

## Library data of the parts
C1-C3 = CSMD0603: Tolerance: ***; User Part Number: 0603; part number: CSMD0603-0.1UF,10%,0603,50V; room: CNTRL_REG
C4-C7 C9 = CSMD0603: Tolerance: ***; User Part Number: 0603; part number: CSMD0603-1.0UF,10%,0603,25V; room: GT_DELAY
C8 C10 = CSMD0805: part number: CSMD0805-0.1UF,5%,0805,50V; room: GT_DELAY
C11-C15 = CSMD0603: Tolerance: ***; User Part Number: 0603; part number: CSMD0603-0.1UF,10%,0603,50V; room: SEL_LO
C16-C21 = CSMD0805: part number: CSMD0805-1.0UF,10%,0805,25V; room: BASE_BUFFER
C22-C25 = CSMD0603: Tolerance: ***; User Part Number: 0603; part number: CSMD0603-0.1UF,10%,0603,50V; room: CAEN_DIG
C26-C30 = CSMD0603: Tolerance: ***; User Part Number: 0603; part number: CSMD0603-0.1UF,10%,0603,50V; room: CHANGE_CLKS
C31 = CSMD0603: Tolerance: ***; User Part Number: 0603; part number: CSMD0603-10NF,10%,0603,25V; room: CLK_PICK
C32-C37 = CSMD0603: Tolerance: ***; User Part Number: 0603; part number: CSMD0603-0.1UF,10%,0603,50V; room: CLK_PICK
C38-C40 = CSMD0603: Tolerance: ***; User Part Number: 0603; part number: CSMD0603-0.1UF,10%,0603,50V; room: ECAL_CONTROL
C41-C46 = CSMD0603: Tolerance: ***; User Part Number: 0603; part number: CSMD0603-0.1UF,10%,0603,50V; room: ELLIE
C47 C48 = CSMD0603: Tolerance: ***; User Part Number: 0603; part number: CSMD0603-0.1UF,10%,0603,50V; room: GENERIC_DELAYS
C49 C51 = CSMD0805: part number: CSMD0805-0.1UF,5%,0805,50V; room: GENERIC_DELAYS
C50 = CSMD0603: Tolerance: ***; User Part Number: 0603; part number: CSMD0603-1.0UF,10%,0603,25V; room: GENERIC_DELAYS
C52-C57 C60 C62 C63 C66 = CSMD0603: Tolerance: ***; User Part Number: 0603; part number: CSMD0603-0.1UF,5%,0603,50V; room: MTCA_MIMIC
C58 C59 C61 C64 C65 = CSMD0805: part number: CSMD0805-0.1UF,5%,0805,50V; room: MTCA_MIMIC
C67 C68 C77 C80 = TANT0805: part number: TANT0805-10UF,5%,0805,25V; room: POWER
C69 C70 C75 C79 C81 = TANT0805: part number: TANT0805-1UF,10%,0805,25V; room: POWER
C71 C72 = CSMD0805: part number: CSMD0805-0.33UF,10%,0805,25V; room: POWER
C73 C74 C82 = TANT0805: part number: TANT0805-0.1UF,5%,0805,50V; room: POWER
C76 C78 = CSMD0805: part number: CSMD0805-0.1UF,5%,0805,50V; room: POWER
C83 = CSMD0805: part number: CSMD0805-10NF,10%,0805,25V; room: POWER
C84 C85 = CSMD0603: Tolerance: ***; User Part Number: 0603; part number: CSMD0603-0.1UF,10%,0603,50V; room: PULSE_INV
C86 C87 = CSMD0603: Tolerance: ***; User Part Number: 0603; part number: CSMD0603-0.1UF,10%,0603,50V; room: RIBBON_DELAY
C88 C90-C94 = CSMD0805: part number: CSMD0805-0.1UF,5%,0805,50V; room: TRANSLATORS
C89 = CSMD0603: Tolerance: ***; User Part Number: 0603; part number: CSMD0603-0.1UF,10%,0603,50V; room: TRANSLATORS
C137-C140 C181 = CSMD0805: part number: CSMD0805-0.1UF,5%,0805,50V; room: CAEN_ANALOG
C141-C180 = CSMD0805: part number: CSMD0805-1UF,10%,0805,25V; room: CAEN_ANALOG
D1 D2 = LED_L: room: GT_DELAY
D3 = LED_L: room: SEL_LO
D4 = LED_L: room: ECAL_CONTROL
D5 D6 = LED_L: room: GENERIC_DELAYS
D7 D8 = LED_L: room: MTCA_MIMIC
D9-D14 = LED_L: room: POWER
L1-L4 = INDUCTOR_L: alternate symbols: (INDUCT805); room: POWER
Q1 = 7915_L: room: POWER
Q2 = 7815S_L: room: POWER
Q3 = LM337T_L: room: POWER
Q4 = LM1117: room: POWER
R1 R2 = RSMD0805: part number: RSMD0805-10K,1%,0805; room: GT_DELAY
R3 R4 = RSMD0805: part number: RSMD0805-100,1%,0805; room: GT_DELAY
R5 = RSMD0805: part number: RSMD0805-100,1%,0805; room: SEL_LO
R6-R11 = RSMD0805: part number: RSMD0805-50,1%,0805; room: SEL_LO
R13-R17 R187-R192 R329 R330 = RSMD0805: part number: RSMD0805-50,1%,0805; room: CAEN_DIG
R18 R19 = RSMD0805: part number: RSMD0805-1000,1%,0805; room: CAEN_DIG
R20-R27 = RSMD0805: part number: RSMD0805-50,1%,0805; room: CLK_PICK
R28 = RSMD0805: part number: RSMD0805-100,1%,0805; room: ECAL_CONTROL
R29-R31 = RSMD0805: part number: RSMD0805-50,1%,0805; room: ECAL_CONTROL
R32-R37 = RSMD0805: part number: RSMD0805-50,1%,0805; room: ELLIE
R38 R39 = RSMD0805: part number: RSMD0805-10K,1%,0805; room: GENERIC_DELAYS
R40 R41 = RSMD0805: part number: RSMD0805-100,1%,0805; room: GENERIC_DELAYS
R42-R65 R67 R69-R71 R73 R74 R350 = RSMD0805: part number: RSMD0805-50,1%,0805; room: MTCA_MIMIC
R66 R68 = RSMD0805: part number: RSMD0805-1000,1%,0805; room: MTCA_MIMIC
R72 R75 = RSMD0805: part number: RSMD0805-10K,1%,0805; room: MTCA_MIMIC
R76 R77 = RSMD0805: part number: RSMD0805-100,1%,0805; room: MTCA_MIMIC
R78 R79 R82-R85 = RSMD0805: part number: RSMD0805-1000,1%,0805; room: POWER
R80 = RSMD0805: part number: RSMD0805-71.5,1%,0805; room: POWER
R81 = RSMD0805: part number: RSMD0805-120,1%,0805; room: POWER
R86 R87 = RSMD0805: part number: RSMD0805-1000,1%,0805; room: PULSE_INV
R88-R99 = RSMD0805: part number: RSMD0805-50,1%,0805; room: RIBBON_DELAY
R100-R107 = RSMD0805: part number: RSMD0805-50,1%,0805; room: TRANSLATORS
R108 R109 = RSMD0805: part number: RSMD0805-1000,1%,0805; room: TRANSLATORS
R183-R186 = RSMD0805: part number: RSMD0805-100,1%,0805; room: CAEN_ANALOG
R193 R210 R227 R244 R261 R278 R295 R312 = RSMD0805: part number: RSMD0805-2K,1%,0805; room: CAEN_ANALOG
R194-R198 R201 R203 R204 R208 R211-R215 R218 R220 R221 R225 R228-R232 R235 R237 R238 R242 R245-R249 R252 R254 R255 R259 R262-R266 R269 R271 R272 R276 R279-R283 R286 R288 R289 R293 R296-R300 R303 R305 R306 R310 R313-R317 R320 R322 R323 R327 = RES_L: alternate symbols: (RES400); room: CAEN_ANALOG
R199 R216 R233 R250 R267 R284 R301 R318 = RSMD0805: part number: RSMD0805-111,1%,0805; room: CAEN_ANALOG
R200 R217 R234 R251 R268 R285 R302 R319 = RSMD0805: part number: RSMD0805-10,1%,0805; room: CAEN_ANALOG
R202 R219 R236 R253 R270 R287 R304 R321 = RSMD0805: part number: RSMD0805-499,1%,0805; room: CAEN_ANALOG
R205-R207 R209 R222-R224 R226 R239-R241 R243 R256-R258 R260 R273-R275 R277 R290-R292 R294 R307-R309 R311 R324-R326 R328 = RSMD0805: part number: RSMD0805-0,1%,0805; room: CAEN_ANALOG
R331-R348 = RSMD0805: part number: RSMD0805-50,1%,0805; room: CHANGE_CLKS
R351-R353 = RSMD0805: part number: RSMD0805-5.1K,1%,0805; room: MTCA_MIMIC
R354 R355 = RSMD0805: part number: RSMD0805-10K,1%,0805; room: CAEN_ANALOG
TP1-TP10 = TESTPOINT_L: room: CNTRL_REG
TP12 = TESTPOINT_L: room: CLK_PICK
TP13-TP17 = TESTPOINT_L: room: POWER
TP127 TP129 TP130 TP135 TP136 = TESTPOINT_L: room: MTCA_MIMIC
TP143-TP198 = TESTPOINT_L: room: CAEN_ANALOG_PORTS
U1 = DS1023200: room: GT_DELAY
U2 = 74F164: room: CNTRL_REG
U3 = 74HCT165: room: CNTRL_REG
U4 = HCT374_1: room: CNTRL_REG
U6 U16 = IDS_C10: User Part Number: ***; room: BASE_BUFFER
U7 = DS1023500: room: GT_DELAY
U8 = MC10H124: room: GT_DELAY
U9 = HCT123: room: GT_DELAY
U10 = MC10H124: room: SEL_LO
U11 = MC10E116: room: SEL_LO
U12 = MC10H104: room: SEL_LO
U13 U14 = OPA4277: room: BASE_BUFFER
U15 = OPA2277: room: BASE_BUFFER
U17 = MC10E116: room: CAEN_DIG
U18 = MC10H125: room: CAEN_DIG
U19 = MMBTH81: room: CAEN_DIG
U20 = DS90LV027: room: CAEN_DIG
U21 = MC10E116: room: CHANGE_CLKS
U22 U23 = SY100EL05: room: CHANGE_CLKS
U24 = MC10H125: room: CHANGE_CLKS
U25 = SS22SDP2: room: CHANGE_CLKS
U26 = FOXCLOCK: room: CLK_PICK
U27 = SY100EL91L: room: CLK_PICK
U28 = SY100EL34L: room: CLK_PICK
U29 = MC10H124: room: CLK_PICK
U30 = MC10H104: room: CLK_PICK
U31 = MC10H124: room: ECAL_CONTROL
U32 = MC10H104: room: ECAL_CONTROL
U33 = MC10H124: room: ELLIE
U34 = MC10H116: room: ELLIE
U35 = MC10H125: room: ELLIE
U36 U37 = DS102350: room: GENERIC_DELAYS
U38 = HCT123: room: GENERIC_DELAYS
U39 U40 = MC10H104: room: MTCA_MIMIC
U41 U42 U46 = MC10H131: room: MTCA_MIMIC
U43 = MC10E116: room: MTCA_MIMIC
U44 = MC10E101: room: MTCA_MIMIC
U45 = MC10H125: room: MTCA_MIMIC
U47 = HCT123: room: MTCA_MIMIC
U48 U49 = OSTOQ047150: room: POWER
U50 = AD8009: room: PULSE_INV
U51 U52 = MC10H116: room: RIBBON_DELAY
U53 U54 = IDS_C10: User Part Number: ***; room: RIBBON_DELAY
U55 = MC10E116: room: TRANSLATORS
U56 = MC10H125: room: TRANSLATORS
U57 = MC10H124: room: TRANSLATORS
U58 = DS90LV019: room: TRANSLATORS
U59 = MMBTH10: room: TRANSLATORS
U60 = MPSH81: room: TRANSLATORS
U97 U98 = 74F164: room: CAEN_ANALOG
U99 U100 = HCT374_1: room: CAEN_ANALOG
U101 = 74F07: room: CAEN_ANALOG
U102-U105 = PRMA1C05B: room: CAEN_ANALOG
U106 U108 U111 U113 U116 U118 U121 U123 U126 U128 U131 U133 U136 U138 U141 U143 = THS3062: room: CAEN_ANALOG
U107 U112 U117 U122 U127 U132 U137 U142 = COTO2342: room: CAEN_ANALOG
U109 U110 U114 U115 U119 U120 U124 U125 U129 U130 U134 U135 U139 U140 U144 U145 = 1N4448: room: CAEN_ANALOG
U146 = REF02: room: CAEN_ANALOG
U147 = OPA277: room: CAEN_ANALOG

## Footprints (pads in the part's own frame, mm; a bottom-side part is the same pattern mirrored in y, then rotated)
CAP0603
  rect 0.635x0.889 smd: 1(0,-2.54) 2(1.321,-2.54)
CAP805
  rect 1.372x1.27 smd: 1(0,1.001) 2(0,-1.001)
CONN10
  round 1.524 hole 0.914: 1(0,0) 2(0,2.54) 3(2.54,0) 4(2.54,2.54) 5(5.08,0) 6(5.08,2.54) 7(7.62,0) 8(7.62,2.54) 9(10.16,0) 10(10.16,2.54)
COTO2300_V1
  round 1.016 hole 0.533: 1(-1.27,8.89) 2(-1.27,6.35) 3(-1.27,-6.35) 4(-1.27,-8.89) 5(1.27,-8.89) 6(1.27,-6.35) 7(1.27,6.35) 8(1.27,8.89)
DIP14_3
  rect 1.524x1.524 hole 0.914: 1(0,0)
  round 1.524 hole 0.914: 2(0,-2.54) 3(0,-5.08) 4(0,-7.62) 5(0,-10.16) 6(0,-12.7) 7(0,-15.24) 8(7.62,-15.24) 9(7.62,-12.7) 10(7.62,-10.16) 11(7.62,-7.62) 12(7.62,-5.08) 13(7.62,-2.54) 14(7.62,0)
DO35
  rect 1.397x1.397 hole 0.635: 1(0,0)
  round 1.397 hole 0.635: 2(0,9.144)
FEC32DTP
  rect 1.524x1.524 hole 0.914: 1(0,0)
INDUCT400
  round 1.651 hole 1.067: 1(0,0) 2(0,10.16)
LED_SSFLXH1031D
  round 1.001 hole 0.8: 1(0,0) 2(0,-2.499)
OSTOQ047150
  round 1.524 hole 0.914: 1(0.442,7.493) 2(0.442,2.489) 3(0.442,-2.489) 4(0.442,-7.493)
PLCC20
  rect 0.635x1.27 smd: 1(0,4.318) 2(-1.27,4.318) 3(-2.54,4.318) 9(-2.54,-4.318) 10(-1.27,-4.318) 11(0,-4.318) 12(1.27,-4.318) 13(2.54,-4.318) 19(2.54,4.318) 20(1.27,4.318)
  rect 1.27x0.635 smd: 4(-4.318,2.54) 5(-4.318,1.27) 6(-4.318,0) 7(-4.318,-1.27) 8(-4.318,-2.54) 14(4.318,-2.54) 15(4.318,-1.27) 16(4.318,0) 17(4.318,1.27) 18(4.318,2.54)
PLCC28
  rect 0.635x1.27 smd: 1(0,5.588) 2(-1.27,5.588) 3(-2.54,5.588) 4(-3.81,5.588) 12(-3.81,-5.588) 13(-2.54,-5.588) 14(-1.27,-5.588) 15(0,-5.588) 16(1.27,-5.588) 17(2.54,-5.588) 18(3.81,-5.588) 26(3.81,5.588) 27(2.54,5.588) 28(1.27,5.588)
  rect 1.27x0.635 smd: 5(-5.588,3.81) 6(-5.588,2.54) 7(-5.588,1.27) 8(-5.588,0) 9(-5.588,-1.27) 10(-5.588,-2.54) 11(-5.588,-3.81) 19(5.588,-3.81) 20(5.588,-2.54) 21(5.588,-1.27) 22(5.588,0) 23(5.588,1.27) 24(5.588,2.54) 25(5.588,3.81)
RES805
  rect 1.372x1.27 smd: 1(0,1.001) 2(0,-1.001)
SMD_FOX
  rect 1.801x1.999 smd: 1(-2.54,2.101) 2(0,2.101) 3(2.54,2.101) 4(2.54,-2.101) 5(0,-2.101) 6(-2.54,-2.101)
SOIC8
  rect 1.27x0.635 smd: 1(-2.477,1.905) 2(-2.477,0.635) 3(-2.477,-0.635) 4(-2.477,-1.905) 5(2.477,-1.905) 6(2.477,-0.635) 7(2.477,0.635) 8(2.477,1.905)
SOIC14
  rect 1.27x0.635 smd: 1(-2.477,3.81) 2(-2.477,2.54) 3(-2.477,1.27) 4(-2.477,0) 5(-2.477,-1.27) 6(-2.477,-2.54) 7(-2.477,-3.81) 8(2.477,-3.81) 9(2.477,-2.54) 10(2.477,-1.27) 11(2.477,0) 12(2.477,1.27) 13(2.477,2.54) 14(2.477,3.81)
SOIC16
  rect 1.27x0.635 smd: 1(-2.477,4.445) 2(-2.477,3.175) 3(-2.477,1.905) 4(-2.477,0.635) 5(-2.477,-0.635) 6(-2.477,-1.905) 7(-2.477,-3.175) 8(-2.477,-4.445) 9(2.477,-4.445) 10(2.477,-3.175) 11(2.477,-1.905) 12(2.477,-0.635) 13(2.477,0.635) 14(2.477,1.905) 15(2.477,3.175) 16(2.477,4.445)
SOIC20
  rect 1.27x0.635 smd: 1(0,0) 2(0,-1.27) 3(0,-2.54) 4(0,-3.81) 5(0,-5.08) 6(0,-6.35) 7(0,-7.62) 8(0,-8.89) 9(0,-10.16) 10(0,-11.43) 11(8.788,-11.43) 12(8.788,-10.16) 13(8.788,-8.89) 14(8.788,-7.62) 15(8.788,-6.35) 16(8.788,-5.08) 17(8.788,-3.81) 18(8.788,-2.54) 19(8.788,-1.27) 20(8.788,0)
SOIC20W
  rect 1.27x0.635 smd: 1(-4.699,5.715) 2(-4.699,4.445) 3(-4.699,3.175) 4(-4.699,1.905) 5(-4.699,0.635) 6(-4.699,-0.635) 7(-4.699,-1.905) 8(-4.699,-3.175) 9(-4.699,-4.445) 10(-4.699,-5.715) 11(4.699,-5.715) 12(4.699,-4.445) 13(4.699,-3.175) 14(4.699,-1.905) 15(4.699,-0.635) 16(4.699,0.635) 17(4.699,1.905) 18(4.699,3.175) 19(4.699,4.445) 20(4.699,5.715)
SOT23
  rect 0.508x0.432 smd: 1(-0.889,0.94) 2(-0.889,-0.965) 3(0.889,0)
SOT223
  rect 1.524x1.016 smd: 1(-3.15,2.301) 2(-3.15,0) 3(-3.15,-2.301)
  rect 1.524x3.302 smd: 4(3.15,0)
SS22SDP2
  rect 1.524x1.524 hole 0.914: 1(-1.27,2.54)
  round 1.524 hole 0.914: 2(-1.27,0) 3(-1.27,-2.54) 4(1.27,2.54) 5(1.27,0) 6(1.27,-2.54)
SSOP16
  rect 1.651x0.33 smd: 1(-3.505,2.276) 2(-3.505,1.626) 3(-3.505,0.975) 4(-3.505,0.325) 5(-3.505,-0.325) 6(-3.505,-0.975) 7(-3.505,-1.626) 8(-3.505,-2.276) 9(3.505,-2.276) 10(3.505,-1.626) 11(3.505,-0.975) 12(3.505,-0.325) 13(3.505,0.325) 14(3.505,0.975) 15(3.505,1.626) 16(3.505,2.276)
TO92
  round 0.889 hole 0.635: 1(0,0) 2(0,-1.27) 3(0,-2.54)
TO220ABH
  round 2.032 hole 1.397: 1(0,0) 2(0,2.54) 3(0,5.08)
  round 4.064 hole 3.81: 4(-14.605,2.54)
TO220ABV
  round 2.032 hole 1.397: 1(0,0) 2(2.54,0) 3(5.08,0)
  round 4.064 hole 3.81: 4(2.54,14.605)

## Nets
